# Altium PCB CH549EVT_Core_Pac_F1809.PcbDoc
Units mil, origin at the board's own origin, x right, y up, seen from the top; angles counter-clockwise.
Board outline 1790.42 x 2155.71 mil, 2 copper layers (Top Layer, Bottom Layer); 16 components, 51 nets, 122 pads, 68 vias.
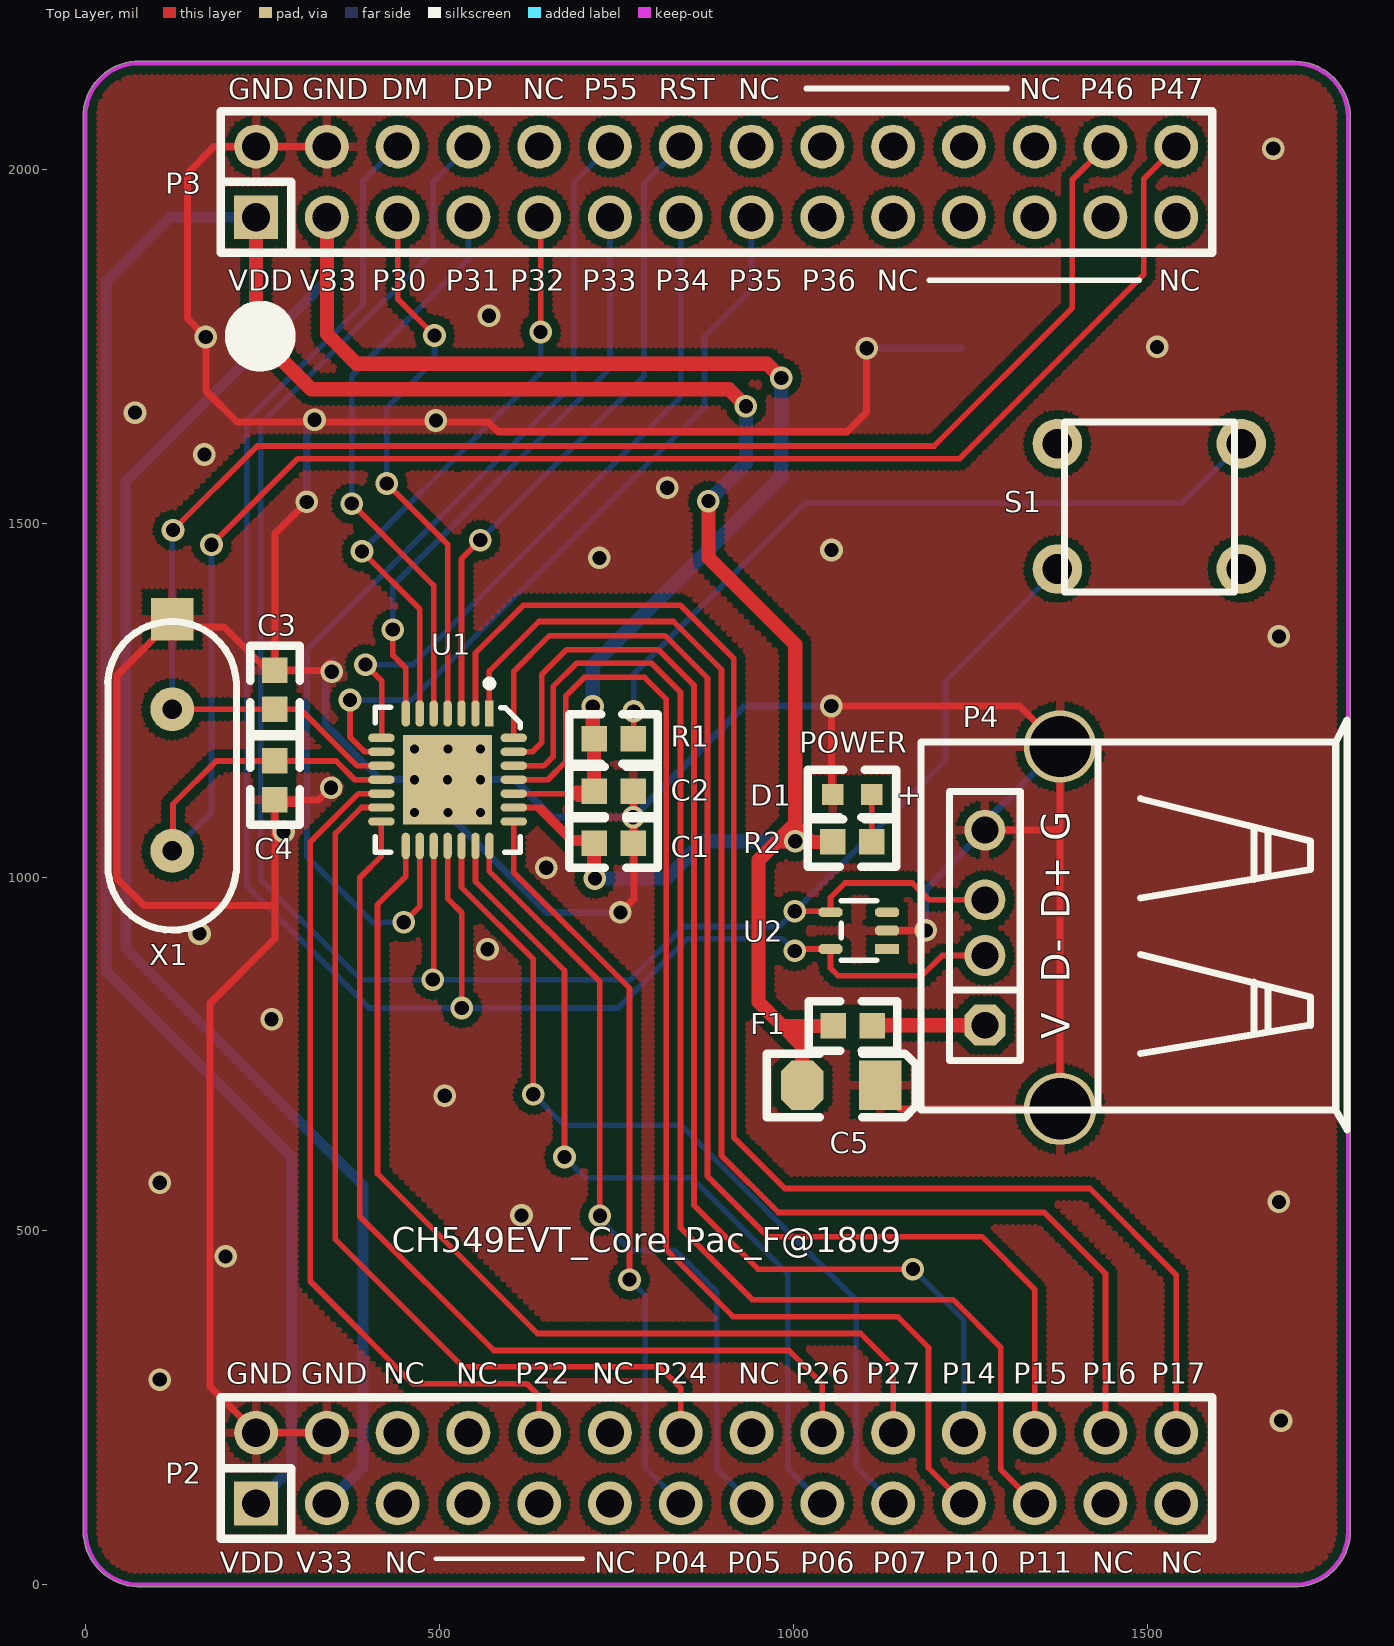
[diagram p0: Top Layer view]
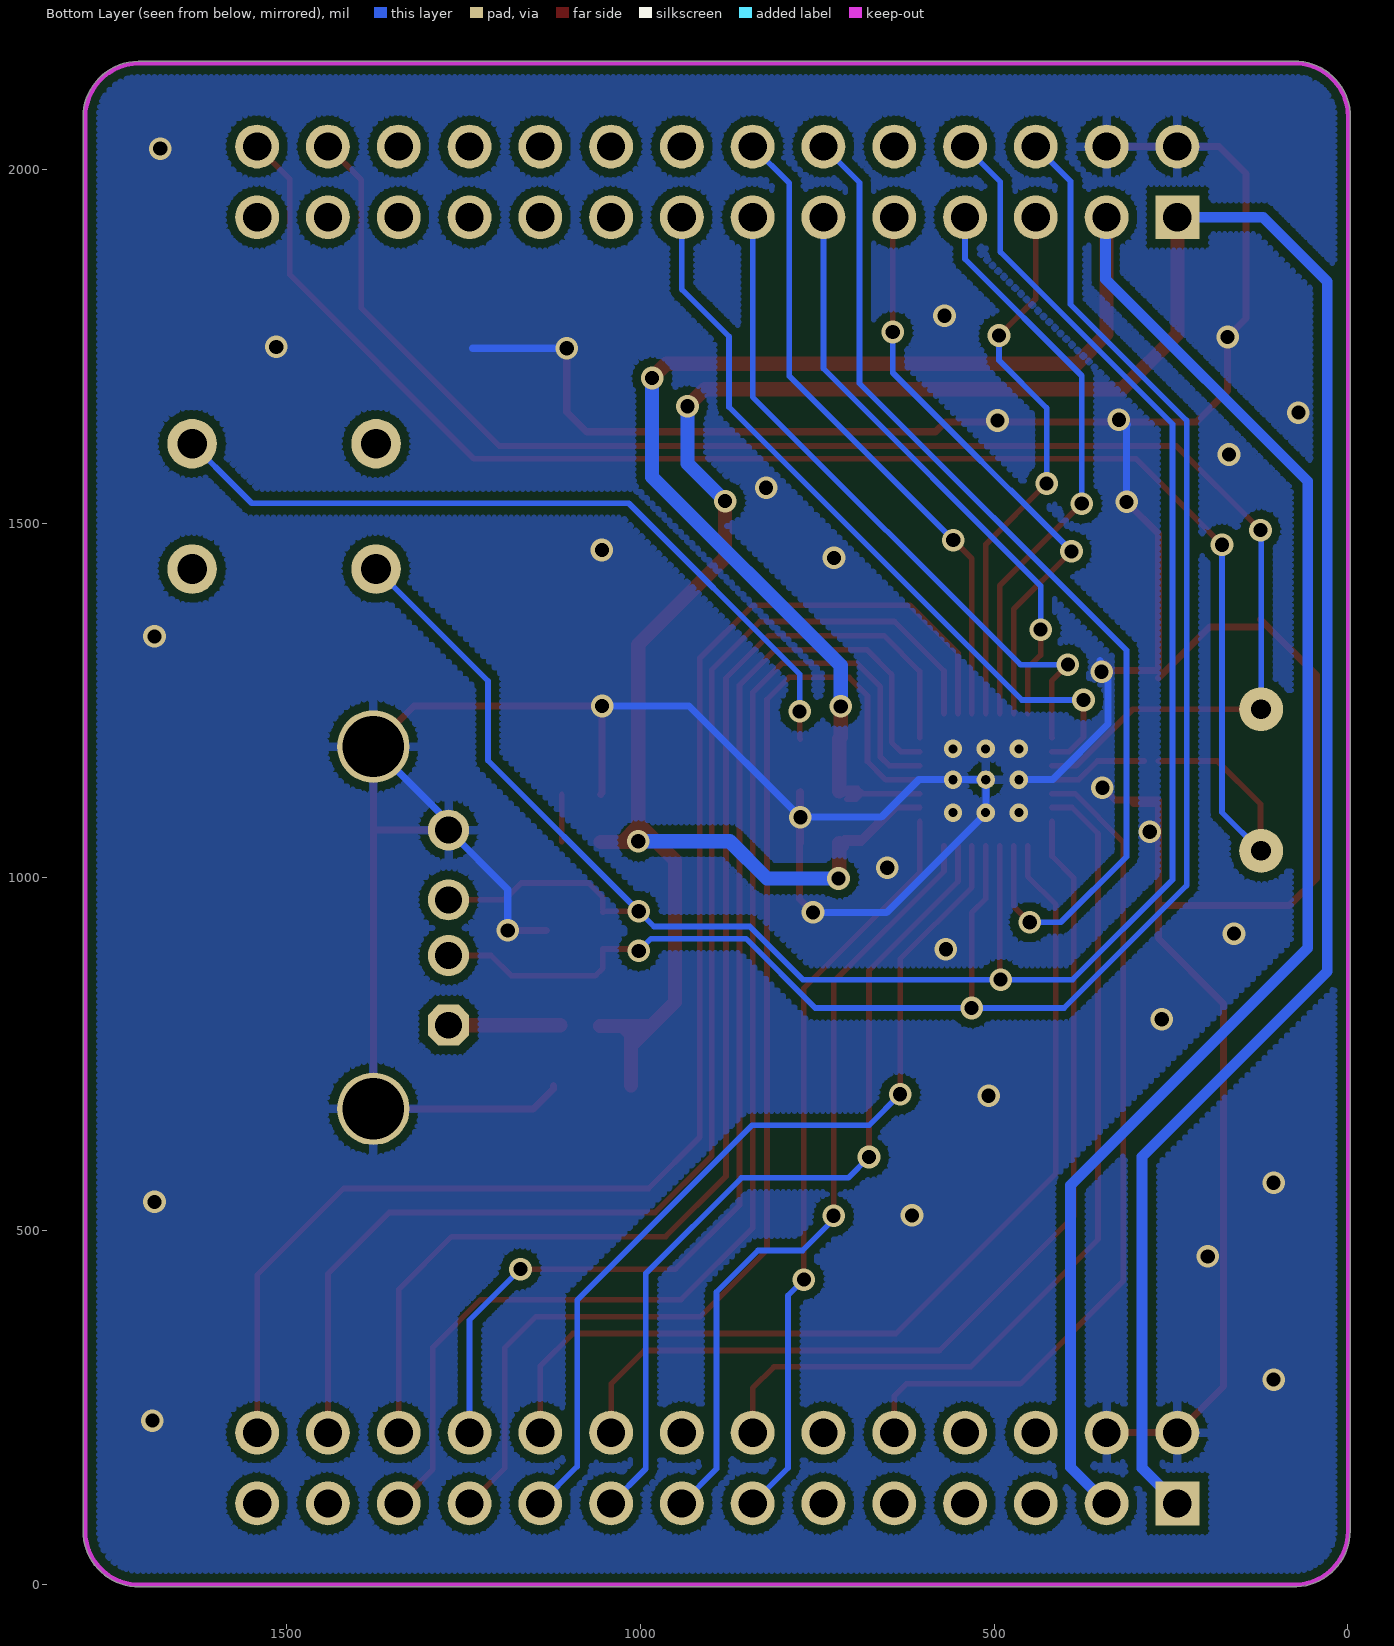
[diagram p1: Bottom Layer view, seen from below]

## Layer stack, top to bottom
Top Layer: signal copper 1.4
Dielectric: dielectric 12.6, FR-4, Dk 4.8
Bottom Layer: signal copper 1.4

## Board outline
72.7,-2.89 ccw(c76.28,76.41) 76.28,-2.97 ccw(c76.28,0.05) 76.96,-2.89 1706.69,-2.89 ccw(c1706.69,0.13) 1706.95,-2.88 ccw(c1707.68,0.05) 1707.68,-2.97 ccw(c1707.68,76.41) 1787.05,76.41 ccw(c1784.03,76.41) 1786.99,77.02 ccw(c1784,77.43) 1787.02,77.43 1787.02,2073.08 ccw(c1784,2073.08) 1787.01,2073.1 ccw(c1784,2073.13) 1787.02,2073.13 ccw(c1707.64,2073.13) 1708.82,2152.49 ccw(c1707.6,2149.73) 1707.6,2152.75 76,2152.75 ccw(c76,2073.38) -3.37,2073.38 ccw(c-0.36,2073.38) -3.02,2071.95 -3.02,77.09 ccw(c-0.08,76.41) -3.09,76.41 ccw(c76.28,76.41)

## Design rules (kind name [scope] priority, off if disabled: settings)
Clearance Clearance_1 [InPolygon] p1: gap=12
Clearance [All] p2: gap=7.87
ComponentClearance [All] p1 off: gap=10 collisioncheckmode=3 verticalgap=10 showdistances=FALSE
MinimumSolderMaskSliver [All] p1 off: minsoldermaskwidth=10
PasteMaskExpansion [All] p1 off: expansion=0
PolygonConnect [IsVia] p1: connectstyle=Direct reliefconductorwidth=10 reliefentries=4 polygonreliefangle="90 Angle"
PolygonConnect PolygonConnect_1 [All] p2: connectstyle=Relief reliefconductorwidth=12 reliefentries=4 polygonreliefangle="90 Angle"
RoutingVias [All] p1: holewidth=20 width=32 viastyle="Through Hole" minholewidth=20 minwidth=32 maxholewidth=30 maxwidth=50
SilkToSilkClearance [All] p1 off: silktosilkclearance=0
SilkscreenOverComponentPads SilkToSolderMaskClearance [IsPad] p1 off: minsilkscreentomaskgap=10
SolderMaskExpansion [All] p1 off: expansion=4
Width [All] p1: maxlimit=20 minlimit=8 preferedwidth=10
23 further rules are at their usual default settings.

## Classes and differential pairs
component class CH549EVT_Core_Pac_F1809: C1 C2 C3 C4 C5 D1 F1 P2 P3 P4 R1 R2 U1 U2 X1

## Components (designator, comment, footprint, x,y, rotation, side; value= is the part's Value field where it differs from the comment)
C1 "Cap" 0603 773.71,1048 r180 top
C2 "Cap" 0603 773.71,1121 r180 top
C3 "(NC 15p)" 0603 267.71,1237 r90 top
C4 "(NC 15p)" 0603 267.71,1164 r270 top
C5 "Cap" 3216 1122.71,705.63 r0 top
D1 "LED3" 0603L 1110.71,1116.63 r180 top
F1 "500mA" 0603 1056.71,789.63 r0 top
P2 "Header 14X2" IDC28 241.06,115 r90 top (schematic designator P14)
P3 "Header 14X2" IDC28 241.06,1932 r90 top (schematic designator P15)
P4 "USB" USBA-L 1270.71,790.63 r90 top
R1 "4.7K" 0603 718.71,1195 r0 top
R2 "Res2" 0603 1055.71,1049.63 r0 top
S1 "" KEYX 1373.06,1435 r90 top
U1 "CH549F" QFN28_4X4 570.71,1231 r270 top
U2 "CH412Z" SOT353 1132.63,898.27 r90 top
X1 "(NC 24MHz)" XTAL62/28 122.71,1237 r180 top

## Footprints (in the part's own frame and the unit in brackets; to place one, negate y for a bottom-side part, rotate by r counter-clockwise, add the part's x,y. Pads: shape width x height; smd on the part's side, far side on the other; paste and mask are expansions set on the pad)
0603 [mil]
  rect 36x36 smd: 1(0,0) 2(55,0)
  silkscreen extent -35,-35 90,35
0603L [mil]
  rect 30x30 smd: 1(0,0) 2(55,0)
  silkscreen extent -35,-35 90,35
3216 [mil]
  rect 60x70 smd: 1(0,0)
  oct 60x70 smd: 2(-110,0)
  silkscreen extent -160,-45 50,45
IDC28 [mil]
  rect 62x62 hole 40: 1(0,0)
  round 62 hole 40: 2(100,0) 3(0,-100) 4(100,-100) 5(0,-200) 6(100,-200) 7(0,-300) 8(100,-300) 9(0,-400) 10(100,-400) 11(0,-500) 12(100,-500) 13(0,-600) 14(100,-600) 15(0,-700) 16(100,-700) 17(0,-800) 18(100,-800) 19(0,-900) 20(100,-900) 21(0,-1000) 22(100,-1000) 23(0,-1100) 24(100,-1100) 25(0,-1200) 26(100,-1200) 27(0,-1300) 28(100,-1300)
  silkscreen extent -50,-1351 150,50
KEYX [mil]
  round 70 hole 42: 1(0,0) 2(0,-259.84) 3(177.17,-259.84) 4(177.17,0)
  silkscreen extent -32,-250 208,-10
QFN28_4X4 [mm]
  round 0.66 hole 0.33: 0(2.375,-1.5)
  rect 3.2x3.2 smd: 0(2.375,-1.5)
  rect 0.95x0.3 smd: 1(0,0)
  oval 0.95x0.3 smd: 2(0,-0.5) 3(0,-1) 4(0,-1.5) 5(0,-2) 6(0,-2.5) 7(0,-3) 15(4.75,-3) 16(4.75,-2.5) 17(4.75,-2) 18(4.75,-1.5) 19(4.75,-1) 20(4.75,-0.5) 21(4.75,0)
  oval 0.3x0.95 smd: 8(0.875,-3.875) 9(1.375,-3.875) 10(1.875,-3.875) 11(2.375,-3.875) 12(2.875,-3.875) 13(3.375,-3.875) 14(3.875,-3.875) 22(3.875,0.875) 23(3.375,0.875) 24(2.875,0.875) 25(2.375,0.875) 26(1.875,0.875) 27(1.375,0.875) 28(0.875,0.875)
  silkscreen extent -1.2,-4.1 4.97,1.1
SOT353 [mil]
  rect 14x34 smd: 1(0,0)
  oct 14x34 smd: 2(26,0) 3(52,0) 4(52,80) 5(0,80)
  silkscreen extent -16,15 68,65
USBA-L [mm]
  oct 1.473x1.473 hole 0.965: 1(0,0)
  round 1.473 hole 0.965: 2(2.5,0) 3(4.5,0) 4(7,0)
  round 2.6 hole 2.2: 5(-3,-2.7) 6(10,-2.7)
  silkscreen extent -3.75,-12.99 10.95,2.29
XTAL62/28 [mil]
  rect 60x60 smd: 0(0,-127)
  round 62 hole 28: 1(0,0) 2(0,200)
  silkscreen extent -91,-124 91,312

## Part data
C1 C2 C5: "Capacitor"
C3 C4: library part Pro1BB.tmp_20p_7
D1: "Typical BLUE SiC LED"
F1: library part "Fuse 1", "Fuse"
P2 P3: "Header, 14-Pin, Dual row"
P4: "USB Port"
R1: library part Res2, "Resistor"
R2: "Resistor"
U1: "8bit MCS51 MCU with ADC & USB type-C host & device & quad UART & SPI"
U2: "Quad ESD protect, low speed"
X1: library part Pro1BB.tmp_12MHz_6

## Via types
v1: diameter 32, hole 20, Top Layer to Bottom Layer, tented both sides, 60 vias
v2: diameter 25.98, hole 12.99, Top Layer to Bottom Layer, tented both sides, 8 vias

## Nets (pads, with @x,y where several pads share a name; then routed paths per layer and width w, separated by ;. In a path a pad name is that pad's centre, name@x,y a point inside that pad or via, vN(x,y) a via of type N, cw(c..) or ccw(c..) an arc to the next point about the centre after c; other vN are vias at no path point)
DM: P3.6 P4.2 U1.18 U2.5 | length 2600.2
  Top Layer w8: U1.18 511.65,969.5 531.71,949.45 v1(531.71,815) ; v1(1002.06,895.63) 1004.7,898.27 U2.5 1052.63,871.06 1063.06,860.63 1182.06,860.63 1210.49,889.06 P4.2
  Bottom Layer w8: P3.6 392.06,1983 392.06,1809 228,1644.94 228,988 401,815 v1(531.71,815) 752.71,815 850.71,913 984.69,913 v1@997.06,900.63 ; v1@1002.06,905.63 v1@997.06,900.63 ; v1@997.06,900.63 v1(1002.06,895.63) 992.06,895.63 v1@997.06,900.63
DP: P3.8 P4.3 S1.1 U1.17 U2.4 | length 3167.7
  Top Layer w8: v1@491.97,855 U1.17 ; v1(1002.06,951.63) 1051.27,951.63 U2.4 ; U2.4@1052.63,955.27 1052.63,971.2 1073.06,991.63 1168.06,991.63 1191.9,967.8 P4.3
  Bottom Layer w8: P3.8 491.06,1982 491.06,1883 247.87,1639.81 247.87,996.19 389.06,855 v1(490.71,855) 770.26,855 845.26,930 980.43,930 v1(1002.06,951.63) 1215.06,1164.63 1215.06,1277 S1.1@1393.06,1455
GND: C1.1 C2.1 C3.2 C4.2 C5.1 D1.2 P2.2 P2.4 P3.2 P3.4 P4.4 P4.5 P4.6 U1.0 U2.2 X1.0 | length 7433.6
  Top Layer w10: X1.0@123.71,1353 195.71,1353 C3.2@267.71,1281 ; X1.0@123.71,1364 44.71,1285 44.71,998 82.71,960 267.71,960 ; v1@275.06,1070 267.71,1077.35 ; 302.71,1104 272.71,1104 C4.2 ; v1(312.71,1530) 267.71,1485 C3.2 334,1292 v1@344,1302 ; P2.4 P2.2 175.71,280.35 175.71,821 267.71,913 267.71,960 ; P3.4 P3.2 182.06,2032 144.06,1994 144.06,1789 v1(170.06,1763) 170.06,1687 214.06,1643 568.71,1643 582.71,1629 1075.71,1629 1103.71,1657 v1(1103.71,1747) ; v1@348.06,1128 329.06,1109 C4.2 ; v1(755.71,950) 774.71,969 774.71,1120 C2.1 v1(773.71,1084.5) C1.1 ; D1.2 1053.71,1118.63 v1(1053.71,1241.63) 1319.71,1241.63 P4.6 P4.5 1150.82,672.52 1122.71,700.63 C5.1 ; U2.2 1132.99,924.63 v1@1181.06,924.63 ; P4.4 1373.6,1066.22 ; 267.71,960 267.71,1077.35 ; 267.71,1077.35 C4.2
  Bottom Layer w10: v1@311.71,1639 312.71,1640 v1(312.71,1530) ; P2.4 P2.4@366.06,215 ; 350.06,1306 350.06,1299.06 339,1288 339,1216.06 417.06,1138 v2@467,1138 ; v1(755.71,950) 651.71,950 511.65,1090.06 511.65,1137.5 606.5,1137.5 659.5,1084.5 v1(773.71,1084.5) 930.84,1241.63 v1(1053.71,1241.63) ; v1(1103.71,1747) 1236.71,1747 ; v1(1187.06,924.63) 1187.06,982.57 P4.4 1270.71,1078.03 P4.6
  other v1: 1689.06,232 105.06,290 198.06,464 616,522 1686.06,541 105.06,568 507.71,691 263.06,799 568.06,898 161.06,920 651,1013 280,1064 347.06,1126 348,1290 1686.06,1340 726.06,1450.92 1054.06,1462 822.06,1550 168.06,1597 495.06,1645 323.71,1646 70.06,1656 1514.06,1749 570.06,1793 1678.06,2029
  other v2: 465,1091 512,1091 558,1091 465,1137.5 558,1137.5 465,1181 512,1181 558,1181
NetD1_1: D1.1 R2.2 | length 67
  Top Layer w8: R2.2 D1.1
NetF1_2: F1.2 P4.1 | length 158
  Top Layer w20: F1.2@1112.71,790.63 P4.1
NetP1_2: R1.2 S1.3 | length 1113.4
  Top Layer w8: R1.2 774.71,1196 v1(774.71,1234)
  Bottom Layer w8: v1(774.71,1234) 774.71,1286.65 1016.06,1528 1548.74,1528 S1.3@1652.91,1632.17
P00: P2.5
P01: P2.7
P02: P2.9
P03: P2.11
P04: P2.13 U1.22 | length 1061.2
  Top Layer w8: U1.22 605.16,1006.55 768.71,843 v1(768.71,431.24)
  Bottom Layer w8: v1(768.71,431.24) 791.06,408.88 791.06,165 P2.13
P05: P2.15 U1.21 | length 1119.3
  Top Layer w8: U1.21 570.71,1008 726.71,852 v1(726.71,521.37)
  Bottom Layer w8: v1(726.71,521.37) 726.71,516.04 770.43,472.32 833.42,472.32 892.06,413.68 892.06,164 P2.15
P06: P2.17 U1.20 | length 1220.4
  Top Layer w8: U1.20 551.02,993.69 676.71,868 v1(676.71,604.37)
  Bottom Layer w8: v1(676.71,604.37) 706.08,575 857.06,575 992.06,440 992.06,164 P2.17
P07: P2.19 U1.19 | length 1278.4
  Top Layer w8: U1.19 531.34,985.37 632.71,884 v1(632.71,693)
  Bottom Layer w8: v1(632.71,693) 676.22,649.49 841.57,649.49 1089.06,402 1089.06,167 P2.19
P10: P2.21 U1.25 | length 1788.9
  Top Layer w8: U1.25 653.2,1137.5 678.71,1163 678.71,1256 704.71,1282 789.71,1282 820.71,1251 820.71,473.22 914.93,379 1147.21,379 1191.06,335.15 1191.06,165 P2.21
P11: P2.23 U1.26 | length 1889.8
  Top Layer w8: U1.26 647.89,1157.18 660.71,1170 660.71,1269 693.71,1302 799.71,1302 840.71,1261 840.71,504.4 942.11,403 1225.57,403 1293.06,335.51 1293.06,163 P2.23
P12: P2.25
P13: P2.27
P14: P2.22 U1.27 | length 1747.6
  Top Layer w8: U1.27 631.57,1176.87 644.71,1190 644.71,1286 679.71,1321 809.71,1321 859.71,1271 859.71,536.29 950,446 v1@1159,446 ; v1@1169,436 v1@1159,446 ; v1(1169,446) v1@1159,446
  Bottom Layer w8: v1(1169,446) 1241.06,373.94 1241.06,363.94 P2.22
P15: P2.24 U1.28 | length 1848
  Top Layer w8: U1.28 605.16,1290.45 655.71,1341 818.71,1341 878.71,1281 878.71,577.29 964,492 1266.5,492 1341.06,417.43 P2.24
P16: P2.26 U1.1 | length 1967.8
  Top Layer w8: U1.1 570.71,1291 640.71,1361 830.71,1361 898.71,1293 898.71,606.29 979,526 1354.54,526 1441.06,439.48 P2.26
P17: P2.28 U1.2 | length 2114.6
  Top Layer w8: U1.2 551.02,1316.31 618.71,1384 840.71,1384 915.71,1309 915.71,632.29 988,560 1418.97,560 1541.06,437.91 P2.28
P20: P2.6
P21: P2.8
P22: P2.10 U1.12 | length 1191.8
  Top Layer w8: U1.12 385.87,1117.81 317.67,1049.61 317.67,429.02 462.69,284 624.1,284 641.06,267.04 P2.10
P23: P2.12
P24: P2.14 U1.13 | length 1291.5
  Top Layer w8: U1.13 389.83,1098.13 353.1,1061.39 353.1,488.07 533.17,308 811,308 841.06,277.94 P2.14
P25: P2.16
P26: P2.18 U1.14 | length 1391
  Top Layer w8: U1.14 418.15,1029.44 387.58,998.87 387.58,520.52 577.1,331 994.06,331 1041.06,284 P2.18
P27: P2.20 U1.15 | length 1414.5
  Top Layer w8: U1.15 452.6,1000.89 412.71,961 412.71,581 638.71,355 1095.06,355 1141.06,309 P2.20
P30: P3.5 U1.4 | length 786
  Top Layer w8: v1(425.71,1556) 511.65,1470.06 U1.4 ; P3.5 441.06,1817 v1(493.06,1765)
  Bottom Layer w8: v1(425.71,1556) 425.71,1662.65 493.06,1730 v1(493.06,1765)
P31: P3.7 U1.5 | length 817.2
  Top Layer w8: v1(376.21,1527.5) 491.97,1411.74 U1.5
  Bottom Layer w8: v1(376.21,1527.5) 376.21,1708.15 541.06,1873 P3.7
P32: P3.9 U1.6 | length 958.9
  Top Layer w8: v1(390.71,1460) 472.28,1378.43 U1.6 ; P3.9 643.06,1930 v1(643.06,1770)
  Bottom Layer w8: v1(390.71,1460) 643.06,1712.35 v1(643.06,1770) ; v1@391.71,1462 475.71,1546
P33: P3.11 U1.7 | length 835.7
  Top Layer w8: v1(434.21,1349.5) 434.21,1313.5 452.6,1295.11 U1.7
  Bottom Layer w8: v1(434.21,1349.5) 434.21,1411.5 741.06,1718.35 P3.11
P34: P3.13 U1.8 | length 968.9
  Top Layer w8: v1(395.71,1300) 418.71,1277 418.71,1197.11 U1.8
  Bottom Layer w8: v1(395.71,1300) 462.71,1300 841.06,1678.35 P3.13
P35: P3.15 U1.9 | length 1061.5
  Top Layer w8: v1@373.71,1238 373.71,1197.35 394.2,1176.87 U1.9
  Bottom Layer w8: v1(373.71,1250) 460.71,1250 874.56,1663.85 874.56,1763.5 941.06,1830 P3.15
P36: P3.17
P37: P3.19
P40: P3.21
P41: P3.23
P42: P3.25
P43: P3.27
P44: P3.22
P45: P3.24
P46: C3.1 P3.26 U1.10 X1.1 | length 2217.8
  Top Layer w8: v1(123.71,1490) 242.71,1609 1199,1609 1394.06,1804.06 1394.06,1985 P3.26 ; X1.1@134.71,1237 C3.1 304.06,1237 383.88,1157.18 U1.10
  Bottom Layer w8: X1.1 122.71,1489 v1(123.71,1490)
P47: C4.1 P3.28 U1.11 X1.2 | length 2529
  Top Layer w8: X1.2@123.71,1026 123.71,1103 184.71,1164 C4.1 ; v1(178.06,1469.35) 299.71,1591 1235.06,1591 1495.06,1851 1495.06,1986 P3.28 ; 287.71,1164 354.06,1164 380.57,1137.5 U1.11 U1.11@417.78,1137.13
  Bottom Layer w8: X1.2@123.71,1037 178.06,1091.35 v1(178.06,1469.35) v1@185.71,1477
P54: P3.10
P55: P3.12 U1.16 | length 1477.2
  Top Layer w8: v1(449.71,936) 472.28,958.57 U1.16
  Bottom Layer w8: v1@449.71,926 439.71,936 405.71,936 313,1028.71 313,1320.29 690.06,1697.35 690.06,1981 P3.12
RST: P3.14 U1.3 | length 929.3
  Top Layer w8: U1.3 531.34,1449.63 v1(557.71,1476)
  Bottom Layer w8: v1(557.71,1476) 789.19,1707.48 789.19,1980.13 P3.14
V33: C2.2 P2.3 P3.3 R1.1 U1.24 | length 3825.1
  Top Layer w8: U1.24 685.52,1117.81 ; C2.2@707.71,1110 695.71,1110 ; C2.2@714.71,1125 692.71,1125 685.52,1117.81 ; 685.52,1117.81 686.9,1117.81 ; 686.9,1117.81 C2.2@703.52,1117.81 ; 686.9,1117.81 694.71,1110 695.71,1110 ; 695.71,1110 C2.2@703.52,1117.81 ; C2.2@703.52,1117.81 706.71,1121 C2.2 715.52,1117.81 C2.2@703.52,1117.81
  Top Layer w20: P3.3 341.06,1767 383.06,1725 963.06,1725 v1(983.06,1705) ; v1(716.71,1241) 716.71,1197 R1.1 C2.2
  Bottom Layer w15: P2.3 392.06,166 392.06,564.65 57.06,899.65 57.06,1559 342.56,1844.5 342.56,1930.5 P3.3
  Bottom Layer w20: v1@718.71,1243 v1(716.71,1241) 716.71,1298.65 983.06,1565 v1(983.06,1705)
VDD: C1.2 C5.2 F1.1 P2.1 P3.1 R2.1 U1.23 | length 4911.1
  Top Layer w8: U1.23 636.58,1098.13 ; 636.58,1098.13 686.71,1048 C1.2 711.71,1055 688,1055 644.87,1098.13 636.58,1098.13
  Top Layer w20: P3.1 241.06,1767 319.06,1689 909.06,1689 v1(933.06,1665) ; C1.2@714.71,1044 C1.2 718.71,999 v1(719.71,998) ; v1(880,1531) 880,1451 1002.71,1328.29 1002.71,1075.63 ; v1@1002.71,1049.63 1025,1049.63 ; C5.2 1012.71,761.63 ; R2.1 1025,1049.63 ; F1.1 1024.71,789.63 ; 977.71,1050.63 v1(1002.71,1050.63) 1002.71,1071.92 ; 977.71,1050.63 950.71,1023.63 950.71,823.63 984.71,789.63 ; 977.71,1050.63 1002.71,1075.63 ; 984.71,789.63 1024.71,789.63 ; 984.71,789.63 1012.71,761.63 ; 1002.71,1071.92 1002.71,1075.63 ; 1002.71,1071.92 1025,1049.63 ; 1012.71,761.63 1012.71,777.63 1024.71,789.63
  Bottom Layer w15: P2.1 291.06,165 291.06,604.65 29.06,866.65 29.06,1841 120.06,1932 P3.1
  Bottom Layer w20: v1(719.71,998) 820.71,998 873.34,1050.63 v1@992.71,1050.63 ; v1(880,1531) 933.06,1584.06 v1(933.06,1665)
pads on no net: P3.16 P3.18 P3.20 S1.2 S1.4 U2.1 U2.3

## Polygon pours and split planes (outlines as drawn)
GND on Top Layer "Top Layer-No Net" (hatched 90Degree grid 8 track 8, remove dead copper, pour order 4): -1,2167.6 4,2162.6 1793,2162.6 1793,15.6 1797,11.6 1796,12.6 7,12.6
GND on Bottom Layer "Top Layer-No Net" (hatched 90Degree grid 8 track 8, remove dead copper, pour order 6): 3,2153.51 1785,2153.51 1785,0.51 4,0.51 3,1.51

## Keep-outs
Keep-Out Layer:
  lines w6: -0.36,2073.38 cw(c76,2073.38) 76,2149.73 1707.6,2149.73 ; -0.08,76.41 ccw(c76.28,76.41) 76.28,0.05 ; 0,76.41 0,2076.13 ; 72.83,0.13 1706.69,0.13 ; 1707.6,2149.48 cw(c1707.64,2073.13) 1784,2073.13 ; 1707.68,0.05 ccw(c1707.68,76.41) 1784.03,76.41 ; 1784,77.43 1784,2073.08

## Silkscreen, mask and mechanical layers (free items; w line width, h text height)
Top Overlay:
  circle w50: c247.06,1764 r25
  lines w6: 495.06,37 628.06,37 703,37
  lines w7.87: 1018.06,2114 1302.06,2114 ; 1192,1843 1488.71,1843
  text "GND" at 202.06,2099 h30
  text "GND" at 306.06,2099 h30
  text "DM" at 418.06,2099 h30
  text "DP" at 519.06,2099 h30
  text "NC" at 618.06,2099 h30
  text "P55" at 704.06,2099 h30
  text "RST" at 810.06,2099 h30
  text "NC" at 922.06,2099 h30
  text "NC" at 1319.06,2099 h30
  text "P46" at 1405.06,2099 h30
  text "P47" at 1503.06,2099 h30
  text "VDD" at 202.06,1828 h30
  text "V33" at 303.06,1828 h30
  text "P30" at 405.06,1828 h30
  text "P31" at 509.06,1828 h30
  text "P32" at 600,1828 h30
  text "P33" at 702,1828 h30
  text "P34" at 805.06,1828 h30
  text "P35" at 909.06,1828 h30
  text "P36" at 1012,1828 h30
  text "NC" at 1118.06,1828 h30
  text "NC" at 1516.06,1828 h30
  text "POWER" at 1008.71,1175.63 h30
  text "CH549EVT_Core_Pac_F@1809" at 433,470 h35
  text "GND" at 199.06,284 h30
  text "GND" at 305.06,284 h30
  text "NC" at 421.06,284 h30
  text "NC" at 524.06,284 h30
  text "P22" at 607.06,284 h30
  text "NC" at 716.06,284 h30
  text "P24" at 802.06,284 h30
  text "NC" at 922.06,284 h30
  text "P26" at 1002.56,284 h30
  text "P27" at 1103.06,284 h30
  text "P14" at 1210.06,284 h30
  text "P15" at 1311.06,284 h30
  text "P16" at 1408.06,284 h30
  text "P17" at 1506.06,284 h30
  text "VDD" at 190.06,17 h30
  text "V33" at 298.06,17 h30
  text "NC" at 423.06,17 h30
  text "NC" at 719,17 h30
  text "P04" at 803,17 h30
  text "P05" at 907,17 h30
  text "P06" at 1010,17 h30
  text "P07" at 1112,17 h30
  text "P10" at 1214.06,17 h30
  text "P11" at 1317.06,17 h30
  text "NC" at 1422.06,17 h30
  text "NC" at 1519.06,17 h30

## Text inside footprints (layer, text, board x,y; h text height)
D1: Top Overlay "+" at 1150.71,1131.63 h30 r270
P4: Top Overlay "G" at 1390.71,1050.63 h40 r90; Top Overlay "V" at 1390.71,770.63 h40 r90; Top Overlay "D+" at 1390.71,940.63 h40 r90; Top Overlay "D-" at 1390.71,850.63 h40 r90